# EAGLE board Layout_PCB (EAGLE 9.7.0)
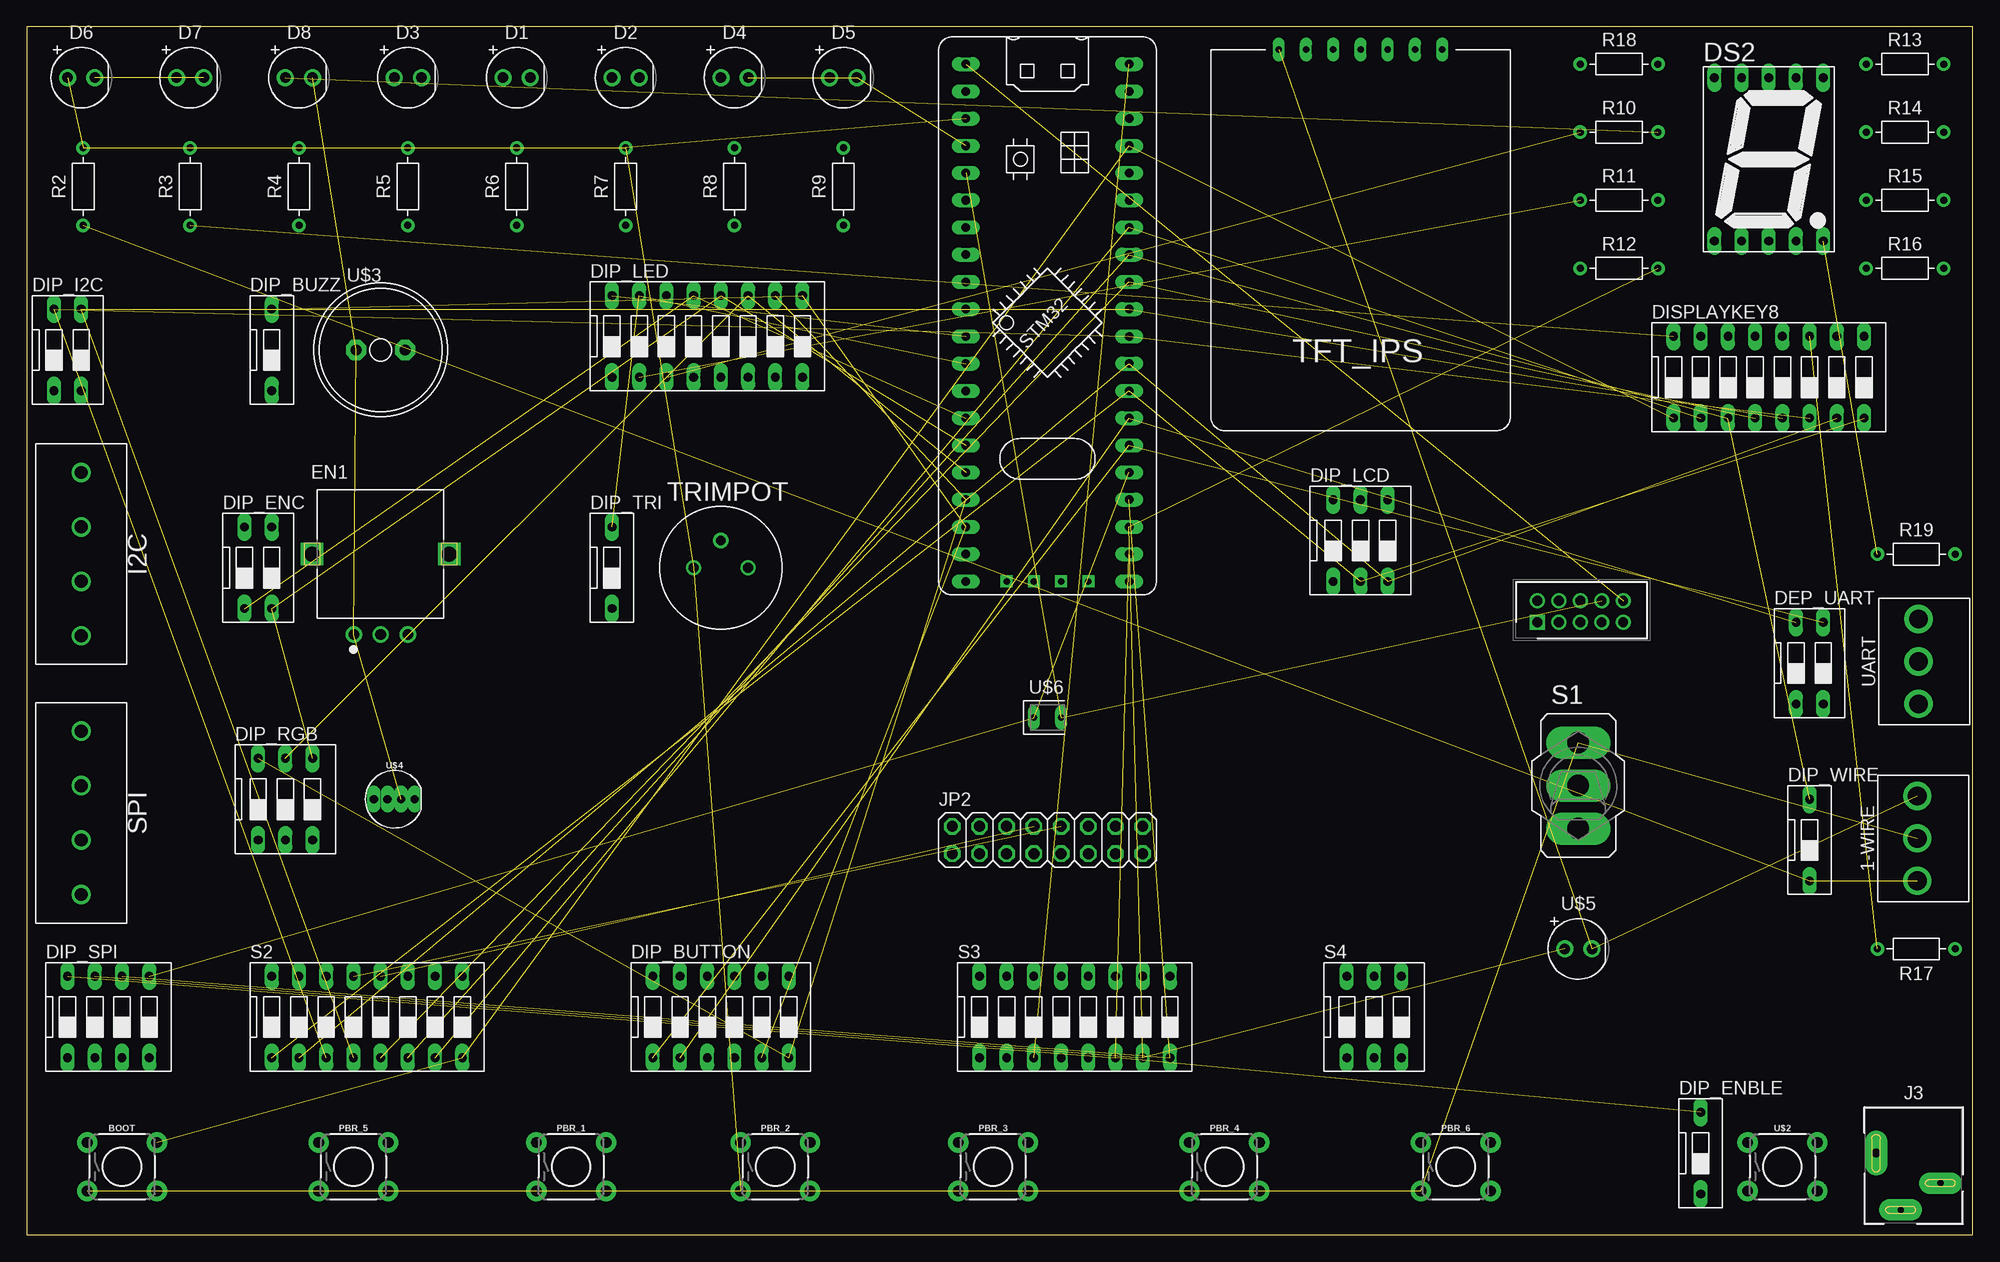
[diagram p0: board, top side]
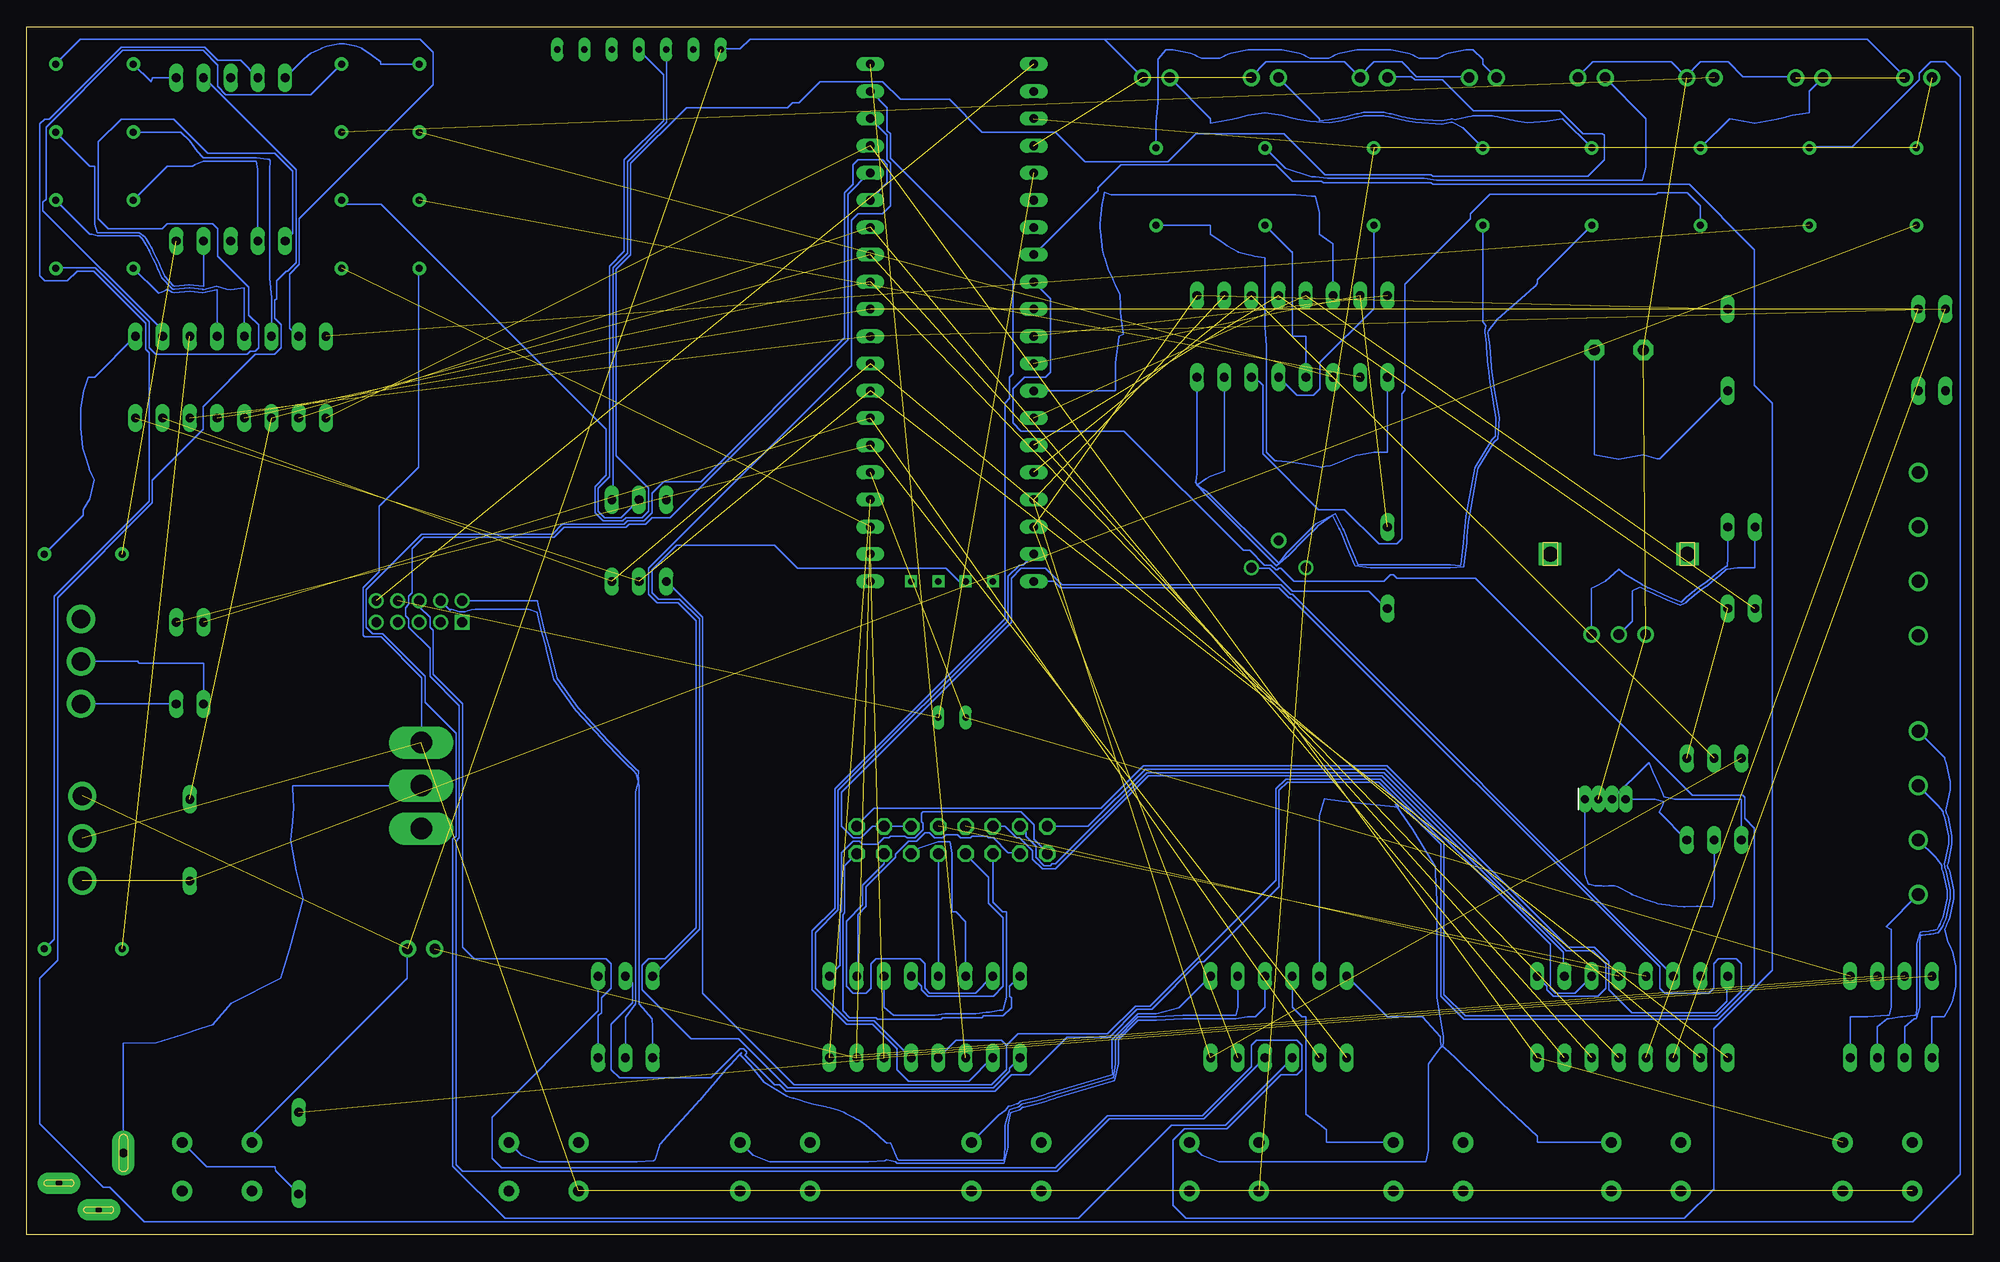
[diagram p1: board, bottom side, seen from below]

Size 181.59 x 112.7 mm. Coordinates in mm from the lower left corner, seen from the top.
Outline: 0,0 181.59,0 181.59,112.7 0,112.7 0,0
Copper layers (1*16): Top / Bottom
Stack-up Default Layer Stack: Top User Defined 0.035mm / Dielectric-1 User Defined 1.5mm / Bottom User Defined 0.035mm
Design rules "default": minimum track width 6mil, minimum drill 0.35mm, track to track 6mil, track to pad 6mil, pad to pad 6mil, via to via 6mil, smd to smd 6mil, copper to edge 40mil, drill to drill 6mil, minimum pad ring 10mil, minimum via ring 8mil, stop-mask expansion 4mil, vias tented up to drill 0mil, thermal gap 10mil

## Footprints (pad centres in the part's own frame; a part is rotated, then mirrored left to right if it is on the bottom)
B3P-VH_396_3N = drill 1.75: 1 0,0; 2 3.96,0; 3 7.92,0
TACTILE_SWITCH_PTH_6.0MM = drill 1.016 pad 1.88: 1 -3.251,2.261; 2 3.251,2.261; 3 -3.251,-2.261; 4 3.251,-2.261
LEDRD254W60D565H860B = drill 0.981 pad 1.581: 1 -1.27,0; 2 1.27,0
DS-02 = drill 0.813 long: 1 -1.27,-3.81; 2 1.27,-3.81; 3 1.27,3.81; 4 -1.27,3.81
DS-06 = drill 0.813 long: 1 -6.35,-3.81; 2 -3.81,-3.81; 3 -1.27,-3.81; 4 1.27,-3.81; 5 3.81,-3.81; 6 6.35,-3.81; 7 6.35,3.81; 8 3.81,3.81; 9 1.27,3.81; 10 -1.27,3.81; 11 -3.81,3.81; 12 -6.35,3.81
DS-01 = drill 0.813 long: 1 0,-3.81; 2 0,3.81
DS-03 = drill 0.813 long: 1 -2.54,-3.81; 2 0,-3.81; 3 2.54,-3.81; 4 2.54,3.81; 5 0,3.81; 6 -2.54,3.81
DS-08 = drill 0.813 long: 1 -8.89,-3.81; 2 -6.35,-3.81; 3 -3.81,-3.81; 4 -1.27,-3.81; 5 1.27,-3.81; 6 3.81,-3.81; 7 6.35,-3.81; 8 8.89,-3.81; 9 8.89,3.81; 10 6.35,3.81; 11 3.81,3.81; 12 1.27,3.81; 13 -1.27,3.81; 14 -3.81,3.81; 15 -6.35,3.81; 16 -8.89,3.81
DS-04 = drill 0.813 long: 1 -3.81,-3.81; 2 -1.27,-3.81; 3 1.27,-3.81; 4 3.81,-3.81; 5 3.81,3.81; 6 1.27,3.81; 7 -1.27,3.81; 8 -3.81,3.81
7SEG-13 = drill 0.813 long: 1 -5.08,-7.62; 2 -2.54,-7.62; 3 0,-7.62; 4 2.54,-7.62; 5 5.08,-7.62; 6 5.08,7.62; 7 2.54,7.62; 8 0,7.62; 9 -2.54,7.62; 10 -5.08,7.62
TFT8 = drill 0.6 long: BLK 7.62,20.32; DC 5.08,20.32; GND -7.62,20.32; RES 2.54,20.32; SCL -2.54,20.32; SDA 0,20.32; VCC -5.08,20.32
PEC11L-4125K-N0020 = drill 1: A -2.5,-7.5; B 2.55,-7.5; C 0,-7.5 | drill 1.4 square: M1 -6.4,0; M2 6.4,0
TERMBLK_508-4N = drill 1.2: 1 0,0; 2 5.08,0; 3 10.16,0; 4 15.24,0
694106402002 = drill 0.8 pad 2.1 long: 1 -3.5,0 | drill 0.6 pad 2 long: 2 -1.2,-5.3; 3 2.5,-2.8
2X08 = drill 1.016 octagon: 1 -8.89,-1.27; 2 -8.89,1.27; 3 -6.35,-1.27; 4 -6.35,1.27; 5 -3.81,-1.27; 6 -3.81,1.27; 7 -1.27,-1.27; 8 -1.27,1.27; 9 1.27,-1.27; 10 1.27,1.27; 11 3.81,-1.27; 12 3.81,1.27; 13 6.35,-1.27; 14 6.35,1.27; 15 8.89,-1.27; 16 8.89,1.27
SHDR10W50P200X200_2X5_1200X500 = drill 0.9 pad 1.35 square: 1 0,0 | drill 0.9 pad 1.35: 2 0,2; 3 2,0; 4 2,2; 5 4,0; 6 4,2; 7 6,0; 8 6,2; 9 8,0; 10 8,2
RESAD724W46L381D178B = drill 0.66 pad 1.26: 1 -3.62,0; 2 3.62,0
320-916 = drill 2.007 long: 1 0,4.013; 2 0,0; 3 0,-4.013
3345P-1-502 = drill 0.91: 1 -2.54,0; 2 0,2.54; 3 2.54,0
EN_BUTTON = drill 1.016 pad 1.88: 1 -3.251,2.261; 2 3.251,2.261; 3 -3.251,-2.261; 4 3.251,-2.261
BUZZER = drill 1.016 pad 1.905 octagon: + 2.286,0; - -2.286,0
LED-RGB-THRU = drill 0.762 pad 0.889 long: 1 1.905,0; 2 0.635,0; 3 -0.635,0; 4 -1.905,0
LDR = drill 0.981 pad 1.581: 1 -1.27,0; 2 1.27,0
LED_POWER_ON = drill 0.6 long: P$1 -1.27,0; P$2 1.27,0
BLUE_PILL_3D = drill 0.8 long: P$1 -7.62,15.24; P$2 -7.62,12.7; P$3 -7.62,10.16; P$4 -7.62,7.62; P$5 -7.62,5.08; P$6 -7.62,2.54; P$7 -7.62,0; P$8 -7.62,-2.54; P$9 -7.62,-5.08; P$10 -7.62,-7.62; P$11 -7.62,-10.16; P$12 -7.62,-12.7; P$13 -7.62,-15.24; P$14 -7.62,-17.78; P$15 -7.62,-20.32; P$16 -7.62,-22.86; P$17 -7.62,-25.4; P$18 -7.62,-27.94; P$19 -7.62,-30.48; P$20 -7.62,-33.02; P$21 7.62,15.24; P$22 7.62,12.7; P$23 7.62,10.16; P$24 7.62,7.62; P$25 7.62,5.08; P$26 7.62,2.54; P$27 7.62,0; P$28 7.62,-2.54; P$29 7.62,-5.08; P$30 7.62,-7.62; P$31 7.62,-10.16; P$32 7.62,-12.7; P$33 7.62,-15.24; P$34 7.62,-17.78; P$35 7.62,-20.32; P$36 7.62,-22.86; P$37 7.62,-25.4; P$38 7.62,-27.94; P$39 7.62,-30.48; P$40 7.62,-33.02 | drill 0.6 square: P$41 3.81,-33.02; P$42 1.27,-33.02; P$43 -1.27,-33.02; P$44 -3.81,-33.02

## Placement (x,y rotation side)
1-WIRE  B3P-VH  [B3P-VH_396_3N]  176.42,33.02 90 top
BOOT  PUSHBUTTON_RED  [TACTILE_SWITCH_PTH_6.0MM]  8.89,6.35 0 top
D1  LED_RED  [LEDRD254W60D565H860B]  45.72,107.95 0 top
D2  LED_RED  [LEDRD254W60D565H860B]  55.88,107.95 0 top
D3  LED_RED  [LEDRD254W60D565H860B]  35.56,107.95 0 top
D4  LED_RED  [LEDRD254W60D565H860B]  66.04,107.95 0 top
D5  LED_RED  [LEDRD254W60D565H860B]  76.2,107.95 0 top
D6  LED_RED  [LEDRD254W60D565H860B]  5.08,107.95 0 top
D7  LED_RED  [LEDRD254W60D565H860B]  15.24,107.95 0 top
D8  LED_RED  [LEDRD254W60D565H860B]  25.4,107.95 0 top
DEP_UART  DS02  [DS-02]  166.37,53.34 0 top
DIP_BUTTON  DS06  [DS-06]  64.77,20.32 0 top
DIP_BUZZ  DS01  [DS-01]  22.86,82.55 0 top
DIP_ENBLE  DS01  [DS-01]  156.21,7.62 0 top
DIP_ENC  DS02  [DS-02]  21.59,62.23 0 top
DIP_I2C  DS02  [DS-02]  3.81,82.55 0 top
DIP_LCD  DS03  [DS-03]  124.46,64.77 0 top
DIP_LED  DS08  [DS-08]  63.5,83.82 0 top
DIP_RGB  DS03  [DS-03]  24.13,40.64 0 top
DIP_SPI  DS04  [DS-04]  7.62,20.32 0 top
DIP_TRI  DS01  [DS-01]  54.61,62.23 0 top
DIP_WIRE  DS01  [DS-01]  166.37,36.83 0 top
DISPLAYKEY8  DS08  [DS-08]  162.56,80.01 0 top
DS2  7SEG-CA  [7SEG-13]  162.56,100.33 0 top
DSPLY1  TFT_IPS_1.3  [TFT8]  124.46,90.26 0 top
EN1  PEC11L-4125K-N0020  [PEC11L-4125K-N0020]  33.02,63.5 0 top
I2C  2828XX-4282837-4  [TERMBLK_508-4N]  5.08,55.88 90 top
J3  [694106402002]  176.07,7.62 0 top
JP2  PINHD-2X8  [2X08]  95.25,36.83 0 top
JTAG  A2004WV-2X05P  [SHDR10W50P200X200_2X5_1200X500]  140.97,57.15 0 top
PBR_1  PUSHBUTTON_RED  [TACTILE_SWITCH_PTH_6.0MM]  50.8,6.35 0 top
PBR_2  PUSHBUTTON_RED  [TACTILE_SWITCH_PTH_6.0MM]  69.85,6.35 0 top
PBR_3  PUSHBUTTON_RED  [TACTILE_SWITCH_PTH_6.0MM]  90.17,6.35 0 top
PBR_4  PUSHBUTTON_RED  [TACTILE_SWITCH_PTH_6.0MM]  111.76,6.35 0 top
PBR_5  PUSHBUTTON_RED  [TACTILE_SWITCH_PTH_6.0MM]  30.48,6.35 0 top
PBR_6  PUSHBUTTON_RED  [TACTILE_SWITCH_PTH_6.0MM]  133.35,6.35 0 top
R2  [RESAD724W46L381D178B]  5.27,97.79 90 top
R3  [RESAD724W46L381D178B]  15.24,97.79 90 top
R4  [RESAD724W46L381D178B]  25.4,97.79 90 top
R5  [RESAD724W46L381D178B]  35.56,97.79 90 top
R6  [RESAD724W46L381D178B]  45.72,97.79 90 top
R7  [RESAD724W46L381D178B]  55.88,97.79 90 top
R8  [RESAD724W46L381D178B]  66.04,97.79 90 top
R9  [RESAD724W46L381D178B]  76.2,97.79 90 top
R10  [RESAD724W46L381D178B]  148.59,102.87 0 top
R11  [RESAD724W46L381D178B]  148.59,96.52 0 top
R12  [RESAD724W46L381D178B]  148.59,90.17 0 top
R13  [RESAD724W46L381D178B]  175.26,109.22 0 top
R14  [RESAD724W46L381D178B]  175.26,102.87 0 top
R15  [RESAD724W46L381D178B]  175.26,96.52 0 top
R16  [RESAD724W46L381D178B]  175.26,90.17 0 top
R17  [RESAD724W46L381D178B]  176.32,26.67 180 top
R18  [RESAD724W46L381D178B]  148.59,109.22 0 top
R19  [RESAD724W46L381D178B]  176.32,63.5 0 top
S1  [320-916]  144.78,41.91 0 top
S2  DS08  [DS-08]  31.75,20.32 0 top
S3  DS08  [DS-08]  97.79,20.32 0 top
S4  DS03  [DS-03]  125.73,20.32 0 top
SPI  2828XX-4282837-4  [TERMBLK_508-4N]  5.08,31.75 90 top
TRIMPOT  3345P-1-502  [3345P-1-502]  64.77,62.23 0 top
U$2  EN_BUTTON  [EN_BUTTON]  163.83,6.35 0 top
U$3  BUZZER  [BUZZER]  33.02,82.55 0 top
U$4  LED_RGB  [LED-RGB-THRU]  34.29,40.64 0 top
U$5  LDR  [LDR]  144.78,26.67 0 top
U$6  LED_POWER_ON  [LED_POWER_ON]  95.25,48.26 0 top
U$8  BLUE_PILL_3D  [BLUE_PILL_3D]  95.25,93.98 0 top
UART  B3P-VH  [B3P-VH_396_3N]  176.53,49.53 90 top

## Library data of the parts
1-WIRE UART = Connector; CATEGORY: Connector; DESCRIPTION: CONN HEADER VERT 3POS 3.96MM; MANUFACTURER: JST Sales America Inc.; MPN: B3P-VH; OPERATING_TEMPERATURE: -25°C ~ 85°C; PART_STATUS: Active; ROHS_COMPLIANCE: RoHS2 Compliant; SERIES: VH; TYPE: Top Entry
BOOT DSPLY1 PBR_1-PBR_6 U$2-U$6 U$8 = 1.3_TFT_IPS
D1-D8 = Opto-Electronic; CATEGORY: Opto-Electronic; SUB-CATEGORY: LED
DEP_UART DIP_ENC DIP_I2C = Switch; CATEGORY: SWITCH; MPN: MCNDS02; TYPE: SPST
DIP_BUTTON = Switch; CATEGORY: SWITCH; MPN: MCNDS-06-V; TYPE: SPST
DIP_BUZZ DIP_ENBLE DIP_TRI DIP_WIRE = Switch; CATEGORY: SWITCH; TYPE: SPST
DIP_LCD DIP_RGB S4 = Switch; CATEGORY: SWITCH; MPN: MCNDS-03-V; TYPE: SPST
DIP_LED DISPLAYKEY8 S2 S3 = Switch; CATEGORY: SWITCH; MPN: MCNDS-08-V; TYPE: SPST
DIP_SPI = Switch; CATEGORY: SWITCH; MPN: MCNDS-04-V; TYPE: SPST
DS2 = Opto-Electronic; CATEGORY: Opto-Electronic; SUB-CATEGORY: Display; TYPE: 7-Segment
EN1 = Encoders; CREATED_BY: PCBLayout.com; DIGIKEY_PARTNO: PEC11L-4125K-N0020-ND; MANUFACTURER: Bourns Inc.; MPN: PEC11L-4125K-N0020
I2C SPI = Connector; CATEGORY: Connector; DESCRIPTION: TERM BLK 4P SIDE ENT 5.08mm PCB; MANUFACTURER: TE Connectivity; MPN: 282837-4; OPERATING_TEMPERATURE: 40°C to +105°C; PART_STATUS: Active; ROHS_COMPLIANCE: RoHS Compliant; SERIES: 283737; SUBCATEGORY: Terminal Block; TYPE: Side Wire Entry
J3 = Connector; CATEGORY: Connector; DESCRIPTION: DC POWER JACK - VERTICAL - THT - 2.0 & 2.5Ø - WR-DC; MANUFACTURER: Würth Elektronik; MPN: 694106402002; OPERATING_TEMPERATURE: -40°C to +85°C; PART_STATUS: Active; ROHS_COMPLIANCE: RoHS Compliant; SERIES: WR-DC; SUBCATEGORY: Power Connector; TYPE: Vertical
JP2 = Connector; CATEGORY: CONNECTOR; SUB-CATEGORY: PIN-HEADER
JTAG = A2004WV-2X05P; DESCRIPTION: A2004WV-2X05P JOINT TECH Socket; wire-board; male; 2mm; PIN: 10; THT; 250V; 3A; -2585C; HEIGHT: 6.75mm; MANUFACTURER_NAME: Joint Tech Electronic; MANUFACTURER_PART_NUMBER: A2004WV-2X05P
R2-R19 = Resistor; CATEGORY: Resistor; SUB-CATEGORY: Fixed
S1 = switch
TRIMPOT = Potentiometer_Trimmers; CREATED_BY: PCBLayout.com; DIGIKEY_PN: 3345P-502-ND; MANUFACTURER: Bourns Inc.; MPN: 3345P-1-502

## Nets
3.3V: DSPLY1.VCC
3.3V1: U$8.P$2
3V: U$8.P$7
3V3: JTAG.10 U$8.P$1
5V: 1-WIRE.2 BOOT.3 D6.1 PBR_1.3 PBR_2.3 PBR_3.3 PBR_4.3 PBR_5.3 PBR_6.3 R2.2 R7.2 R12.1 S1.1 TRIMPOT.1 U$8.P$3
AGND: J3.3
GND: 1-WIRE.3 D1.2 D2.2 D3.2 D4.2 D5.2 D6.2 D7.2 D8.2 DSPLY1.GND EN1.A U$2.1 U$3.- U$4.2 U$5.2 U$8.P$4
GND1: JTAG.8 U$6.P$2 U$8.P$5
GND3: U$8.P$10
N$1: DS2.7 R3.2
N$2: DS2.6 R13.1
N$3: DS2.4 R14.2
N$4: J3.1 S1.2
N$5: DS2.2 R15.1
N$6: DS2.1 R16.2
N$7: DS2.9 R17.1
N$8: DS2.10 R18.1
N$9: DS2.5 R19.1
N$11: D4.1 R5.2
N$12: D5.1 R6.2
N$13: D7.1 R4.2
N$14: D3.1 R8.2
N$15: D8.1 R10.2
N$16: D2.1 R11.2
N$17: D1.1 R9.2
NRST: S4.6 U$8.P$43
PA0: DIP_LED.16 U$8.P$11
PA1: DIP_LED.15 DIP_TRI.2 U$8.P$12
PA2: DIP_LED.14 U$8.P$13
PA3: DIP_ENC.1 DIP_LED.13 U$8.P$14
PA4: DIP_ENC.2 DIP_LED.12 DIP_RGB.4 U$8.P$15
PA5: DIP_LED.11 DIP_RGB.5 U$8.P$16
PA6: DIP_BUTTON.6 DIP_LED.10 DIP_RGB.6 U$8.P$17
PA7: DIP_BUTTON.5 DIP_BUZZ.2 DIP_LED.9 U$8.P$18
PA8: S3.5 U$8.P$19
PA9: DIP_LCD.1 S3.4 U$8.P$20
PA10: S3.3 U$8.P$21
PA11: S3.2 U$8.P$22
PA12: S3.1 U$8.P$23
PA15: BOOT.2 DISPLAYKEY8.1 S2.8 U$8.P$24
PB0: DIP_BUTTON.4 U$8.P$25
PB1: DIP_BUTTON.3 U$8.P$26
PB3: DISPLAYKEY8.2 S2.7 U$8.P$27
PB4: DIP_WIRE.2 DISPLAYKEY8.3 S2.6 U$8.P$28
PB5: DISPLAYKEY8.4 S2.5 U$8.P$29
PB6: DIP_I2C.3 DISPLAYKEY8.5 S2.4 U$8.P$30
PB7: DIP_I2C.4 DISPLAYKEY8.6 S2.3 U$8.P$31
PB8: DIP_LCD.3 DISPLAYKEY8.7 S2.2 U$8.P$32
PB9: DIP_LCD.2 DISPLAYKEY8.8 S2.1 U$8.P$33
PB10: DEP_UART.4 DIP_BUTTON.2 U$8.P$34
PB11: DEP_UART.3 DIP_BUTTON.1 U$8.P$35
PB12: DIP_SPI.5 U$6.P$1 U$8.P$36
PB13: DIP_SPI.6 S3.8 U$8.P$37
PB14: DIP_SPI.7 R12.2 S3.7 U$5.1 U$8.P$38
PB15: DIP_ENBLE.2 DIP_SPI.8 S3.6 U$8.P$39
PD1: DISPLAYKEY8.16 R3.1
PD2: DISPLAYKEY8.15 R13.2
PD3: DISPLAYKEY8.14 R14.1
PD4: DISPLAYKEY8.13 R15.2
PD5: DISPLAYKEY8.12 R16.1
PD6: DISPLAYKEY8.11 R17.2
PD7: DISPLAYKEY8.10 R18.2
PD8: DISPLAYKEY8.9 R19.2
PE1: DIP_ENC.3 EN1.B
PE2: DIP_ENC.4 EN1.C
PEN1: DIP_ENBLE.1 U$2.2
PF1: DIP_LCD.4 DSPLY1.SCL
PF2: DIP_LCD.5 DSPLY1.SDA
PF3: DIP_LCD.6
PH1: JP2.1 S3.9
PH2: JP2.3 S3.10
PH3: JP2.5 S3.11
PH4: JP2.7 S3.12
PH5: JP2.9 S3.13
PH6: JP2.11 S3.14
PH7: JP2.13 S3.15
PH8: JP2.15 S3.16
PH9: JP2.2 S2.9
PH10: JP2.4 S2.10
PH11: JP2.6 S2.11
PH12: JP2.8 S2.12
PH13: JP2.10 S2.13
PH14: JP2.12 JP2.14 S2.14
PH15: S2.15
PH16: JP2.16 S2.16
PI1: DIP_I2C.2
PI2: DIP_I2C.1
PJ1: JTAG.2 S4.1
PJ2: JTAG.4 S4.2
PJ3: JTAG.6 S4.3
PL1: DIP_LED.8 R5.1
PL2: DIP_LED.7 R6.1
PL3: DIP_LED.6 R4.1
PL4: DIP_LED.5 R7.1
PL5: DIP_LED.4 R8.1
PL6: DIP_LED.3 R10.1
PL7: DIP_LED.2 R11.1
PL8: DIP_LED.1 R9.1
PN1: DIP_BUTTON.12 PBR_2.2
PN2: DIP_BUTTON.11 PBR_5.2
PN3: DIP_BUTTON.10 PBR_1.2
PN4: DIP_BUTTON.9 PBR_4.2
PN5: DIP_BUTTON.8 PBR_6.2
PN6: DIP_BUTTON.7 PBR_3.2
PR1: DIP_RGB.3 U$4.4
PR2: DIP_RGB.2 U$4.1
PR3: DIP_RGB.1 U$4.3
PS1: DIP_SPI.4 SPI.1
PS2: DIP_SPI.3 SPI.2
PS3: DIP_SPI.2 SPI.3
PS4: DIP_SPI.1 SPI.4
PT1: DIP_TRI.1 TRIMPOT.3
PU1: DEP_UART.2 UART.1
PU2: DEP_UART.1 UART.2
PW1: 1-WIRE.1 DIP_WIRE.1 R2.1
PZ1: DIP_BUZZ.1 U$3.+
SWCLK: S4.5 U$8.P$9
SWDIO: S4.4 U$8.P$8

## Tracks (layer width: path | path; a pad name or v marks a point on that pad's centre or on a via)
3V3  (1 unrouted)
5V  (13 unrouted)
  Bottom 0.152: R12.1 145.03,90.07 145.03,71.63 148.69,67.97 148.69,61.87 150.22,60.35 150.22,55.93 150.06,55.78 148.54,55.78 144.73,51.97 144.73,46.02 S1.1
GND  (8 unrouted)
  Bottom 0.152: 81.03,111.56 114.1,111.56 115.01,110.64 116.84,110.64 DSPLY1.GND | 81.03,111.56 77.52,108.05 D5.2 | 81.03,111.56 9.86,111.56 6.35,108.05 D6.2 | 26.77,108.05 25.4,109.42 22.81,109.42 21.44,108.05 16.56,108.05 D7.2 | 26.77,108.05 28.14,109.42 35.46,109.42 36.83,108.05 D3.2 | 26.77,108.05 D8.2 | U$2.1 160.58,9.45 146.1,23.93 146.1,26.67 U$5.2 | 57.25,108.05 55.88,109.42 53.29,109.42 51.92,108.05 47.04,108.05 D1.2 | 57.25,108.05 58.62,109.42 65.94,109.42 67.31,108.05 D4.2 | 57.25,108.05 D2.2
GND1  (2 unrouted)
N$1
  Bottom 0.152: R3.2 15.19,101.5 11.23,101.5 4.98,107.75 4.98,108.36 3.91,109.42 2.54,109.42 1.17,108.05 1.17,5.64 5.59,1.22 170.64,1.22 173.84,4.42 174.45,4.42 180.39,10.36 180.39,23.93 178.71,25.6 178.71,59.44 169.88,68.28 169.88,70.41 165.15,75.13 165.15,77.27 160.27,82.14 158.44,82.14 157.84,82.75 157.84,84.89 158.44,85.5 158.44,87.17 158.29,87.33 158.29,89 157.38,89.92 157.23,89.92 156.46,90.68 156.46,99.36 165,107.9 DS2.7
N$2
  Bottom 0.152: R13.1 170,107.58 169.89,107.84 169.86,107.95 DS2.6
N$3
  Bottom 0.152: DS2.4 165.1,89.41 165.09,88.49 165.12,88.5 166.44,88.64 166.47,88.64 167.77,88.51 167.94,88.53 168.71,89.44 169.06,90.17 169.07,90.2 169.14,90.36 169.19,90.49 169.29,90.71 169.34,90.81 169.56,91.26 169.74,91.62 169.84,91.84 169.85,91.85 169.91,92 169.97,92.14 170.17,92.47 170.47,92.95 170.56,93.11 171.08,93.5 175.04,93.5 175.26,94.26 175.26,99.69 175.7,99.69 R14.2
N$4
  Bottom 0.152: S1.2 156.76,41.91 156.72,40.64 156.7,39.9 156.79,38.52 156.91,37.27 156.97,36.83 156.44,33.95 156,32.09 155.79,31.35 157.06,26.67 157.74,24.39 157.88,23.95 162.5,21.61 164.26,19.61 165.31,19.28 167.08,18.67 169.5,17.93 172.57,17.88 J3.1
N$5
  Bottom 0.152: DS2.2 160.02,99.42 160.2,100.18 165.12,100.18 165.9,99.83 166.1,99.69 168.47,99.69 R15.1
N$6
  Bottom 0.152: DS2.1 156.77,93.42 156.77,99.21 158.44,100.89 164.69,100.89 167.89,104.09 172.77,104.09 174.9,101.96 174.9,94.79 173.99,93.88 168.96,93.88 168.5,94.34 164.24,94.34 163.78,93.88 163.78,91.29 160.88,88.39 160.88,85.8 159.97,84.89 159.97,82.75 160.27,82.45 160.73,82.45 161.04,82.14 169.57,82.14 170.18,82.75 170.18,85.19 175.21,90.22 178.87,90.22 R16.2
N$7
  Bottom 0.152: DS2.9 161.65,109.58 163.78,109.58 165,110.8 172.77,110.8 179.48,104.09 179.93,104.09 180.39,103.63 180.39,89.46 179.93,89 177.8,89 176.89,89.92 175.36,89.92 170.48,85.04 170.48,82.6 170.18,82.3 170.18,68.43 179.02,59.59 179.02,27.58 R17.1
N$8
  Bottom 0.152: R18.1 148.59,109.22 148.59,109.46 149.43,110.08 150.32,110.68 150.44,110.73 150.7,110.84 150.81,110.88 151.97,111.12 152.45,111.12 153.61,110.88 153.72,110.84 153.98,110.73 154.11,110.68 154.13,110.66 155.09,110.23 155.1,110.24 155.7,109.73 DS2.10
N$9  (1 unrouted)
N$11
  Bottom 0.152: D4.1 60.96,104.14 60.96,103.93 60.09,104.03 58.95,104.23 58.8,104.26 58.49,104.32 58.34,104.36 57.51,104.57 57.34,104.61 57.02,104.67 56.85,104.7 56.81,104.71 54.95,104.71 54.91,104.7 54.74,104.67 54.42,104.61 54.25,104.57 53.41,104.36 53.27,104.32 52.96,104.26 52.82,104.23 51.97,104.08 49.6,103.93 48.76,104.08 48.6,104.11 48.27,104.03 48.11,104.06 47.28,104.28 47.12,104.31 46.8,104.37 46.64,104.4 46.6,104.41 44.84,104.41 44.8,104.4 44.64,104.37 44.32,104.31 44.16,104.28 43.33,104.06 43.17,104.03 42.87,103.96 42.71,103.93 41.57,103.72 39.74,103.88 38.6,104.08 38.29,104.14 R5.2
N$12
  Bottom 0.152: D5.1 71.12,104.14 71.12,103.72 69.08,104.08 68.47,104.21 67.64,104.42 66.98,104.55 66.04,104.69 65.1,104.55 64.44,104.42 63.61,104.21 63,104.08 61.86,103.88 60.03,103.72 58.89,103.93 58.73,103.96 58.43,104.03 58.27,104.06 57.44,104.28 57.28,104.31 56.96,104.37 56.8,104.4 56.76,104.41 55,104.41 54.96,104.4 54.8,104.37 54.48,104.31 54.32,104.28 53.49,104.06 53.33,104.03 53.03,103.96 52.87,103.93 52.03,103.78 49.55,103.63 48.7,103.78 48.54,103.81 47.59,103.28 R6.2
N$13
  Bottom 0.152: R4.2 22.67,104.14 22.36,104.08 20.32,103.72 18.28,104.08 17.67,104.21 16.84,104.42 16.18,104.55 15.24,104.69 15.24,106.68 D7.1
N$14
  Bottom 0.152: R8.2 64.14,99.51 61.69,98.7 61.33,98.7 60.23,98.55 51.16,98.55 50.07,98.4 30.84,98.4 30.48,99.62 30.48,104.14 D3.1
N$15  (1 unrouted)
N$16
  Bottom 0.152: D2.1 54.51,108.05 52.38,108.05 52.07,107.75 49.48,107.75 46.58,104.85 38.51,104.85 36.37,102.72 34.54,102.72 34.39,102.56 34.39,100.28 35.92,98.75 50.39,98.75 50.55,98.91 60.45,98.91 64.26,102.72 72.49,102.72 75.08,100.13 82.85,100.13 85.6,102.87 92.46,102.87 95.5,105.92 100.08,105.92 101.75,107.59 107.54,107.59 109.52,105.61 110.13,105.61 110.59,105.16 120.04,105.16 125.22,99.97 125.22,91.44 126.59,90.07 126.59,72.69 123.55,69.65 123.55,67.51 124.16,66.9 125.68,66.9 125.98,66.6 127.81,66.6 128.57,67.36 128.57,69.8 127.51,70.87 127.51,75.13 148.54,96.16 151.89,96.16 152.2,96.47 R11.2
N$17
  Bottom 0.152: R9.2 76.2,103.77 76.05,105.6 76.05,109.69 75.27,110.56 75.25,110.57 74.62,110.57 73.01,110.23 72.86,110.17 72.53,110.04 72.37,109.97 71.99,109.76 70.25,109.76 69.87,109.97 69.71,110.04 69.38,110.17 69.23,110.23 67.62,110.57 66.99,110.57 66.97,110.56 65.11,110.56 65.09,110.57 64.46,110.57 62.85,110.23 62.7,110.17 62.37,110.04 62.21,109.97 61.84,109.76 60.09,109.76 59.71,109.97 59.55,110.04 59.22,110.17 59.07,110.23 57.46,110.57 56.83,110.57 56.81,110.56 54.95,110.56 54.93,110.57 54.3,110.57 52.69,110.23 52.54,110.17 52.21,110.04 52.05,109.97 51.68,109.76 49.93,109.76 49.55,109.97 49.39,110.04 49.06,110.17 48.91,110.23 47.3,110.57 46.67,110.57 46.65,110.56 45.72,109.69 45.72,109.22 D1.1
NRST
  Bottom 0.152: U$8.P$43 94.59,60.96 95.81,62.18 109.68,62.18 111.81,64.31 120.95,64.31 123.24,62.03 123.24,59.89 122.63,59.28 120.65,59.28 118.82,57.45 118.82,28.5 S4.6
PA0  (1 unrouted)
PA1  (2 unrouted)
PA2
  Bottom 0.152: U$8.P$13 80.9,78.74 79.98,78.75 79.99,78.78 79.99,81.24 79.98,81.27 79.98,81.32 79.98,81.34 79.69,83.81 79.68,83.84 79.26,84.04 79.3,84.22 79.51,86.01 79.53,86.63 79.53,86.7 79.53,86.72 79.57,87.67 79.57,87.69 79.98,88.61 80.07,88.79 80.25,89.17 80.34,89.37 80.59,89.89 80.64,90 80.99,91.09 81.05,91.29 81.15,91.67 81.19,91.86 81.41,93.63 81.42,93.9 81.42,94.25 81.43,94.34 81.26,96.12 81.13,96.76 81.01,97.25 80.43,97.03 63.16,97.03 61.69,96.88 61.33,96.88 60.96,95.35 60.96,93.33 59.96,92.63 59.69,92.46 DIP_LED.14
PA3  (2 unrouted)
PA4  (3 unrouted)
PA5  (2 unrouted)
PA6  (3 unrouted)
PA7  (3 unrouted)
PA8
  Bottom 0.152: S3.5 102.51,19.96 104.95,19.96 108,23.01 108,28.19 105.87,30.33 105.87,41.45 90.02,57.3 90.02,61.42 88.95,62.48 88.65,62.48 U$8.P$19
PA9
  Bottom 0.152: S3.4 94.89,18.14 90.63,18.14 90.17,17.68 | 90.17,17.68 90.17,15.39 91.54,14.02 109.98,14.02 118.52,22.55 118.52,57.61 121.87,60.96 DIP_LCD.1 | U$8.P$20 85.75,60.96 85.14,60.35 64.72,60.35 63.8,59.44 63.65,59.44 29.21,24.99 29.21,23.01 28.75,22.55 24.64,22.55 24.18,23.01 24.18,25.3 23.72,25.76 22.05,25.76 21.59,25.3 21.59,22.71 23.88,20.42 47.35,20.42 49.33,22.4 49.33,36.58 55.27,42.52 64.11,42.52 65.02,41.6 65.02,33.07 76.76,21.34 78.13,21.34 80.72,18.75 89.1,18.75 90.17,17.68
PA10  (1 unrouted)
PA11
  Bottom 0.152: U$8.P$22 102.82,106.68 101.29,105.16 101.29,103.02 100.99,102.72 100.99,100.43 89.56,89 89.56,80.31 89.86,80.01 89.86,78.03 90.32,77.57 90.32,57.45 106.17,41.6 106.17,30.48 108.31,28.35 108.31,22.86 105.1,19.66 102.67,19.66 100.38,17.37 100.38,15.39 99.31,14.33 93.67,14.33 91.54,16.46 S3.2
PA12
  Bottom 0.152: U$8.P$23 101.29,102.56 101.29,100.28 100.99,99.97 100.99,96.01 101.75,95.25 104.04,95.25 104.65,94.64 104.65,81.08 123.55,62.18 123.55,59.74 122.78,58.98 120.8,58.98 119.13,57.3 119.13,28.65 122.02,25.76 123.55,25.76 124.16,25.15 124.16,22.86 119.58,18.29 115.16,18.29 110.59,13.72 91.39,13.72 89.86,15.24 89.86,15.54 S3.1
PA15  (3 unrouted)
PB0
  Bottom 0.152: DIP_BUTTON.4 71.73,10.82 80.57,10.82 85.45,5.94 140.92,5.94 141.53,6.55 141.53,36.73 141.22,37.03 141.22,49.38 143.97,52.12 143.97,54.71 145.95,56.69 145.95,57.45 146.25,57.76 146.25,58.52 145.95,58.83 145.95,59.59 145.64,59.89 145.64,64.01 144.58,65.08 132.38,65.08 131.47,65.99 125.68,65.99 125.37,66.29 123.85,66.29 123.24,66.9 121.56,66.9 104.95,83.52 104.95,97.08 102.97,99.06 U$8.P$25
PB1
  Bottom 0.152: DIP_BUTTON.3 63.5,16.46 69.75,10.21 74.78,10.21 83.46,1.52 136.96,1.52 141.83,6.4 141.83,36.88 141.53,37.19 141.53,46.79 144.42,49.68 144.42,52.12 148.39,56.08 149.3,56.08 149.91,56.69 149.91,60.2 144.73,65.38 132.54,65.38 131.62,66.29 125.83,66.29 125.53,66.6 124,66.6 123.24,67.36 123.24,69.19 122.17,70.26 118.67,70.26 105.26,83.67 105.26,97.23 104.5,97.99 104.5,99.82 104.04,100.28 101.75,100.28 101.29,99.82 101.29,98.15 102.82,96.62 U$8.P$26
PB3  (2 unrouted)
PB4  (3 unrouted)
PB5  (2 unrouted)
PB6  (3 unrouted)
PB7  (3 unrouted)
PB8  (3 unrouted)
PB9  (3 unrouted)
PB10  (2 unrouted)
PB11  (2 unrouted)
PB12  (2 unrouted)
PB13  (2 unrouted)
PB14  (4 unrouted)
PB15  (3 unrouted)
PD1  (1 unrouted)
PD2
  Bottom 0.152: R13.2 178.87,109.27 176.58,111.56 144.88,111.56 143.66,110.34 143.66,107.29 156.16,94.79 156.16,90.53 157.07,89.61 157.07,84.58 156.31,83.82 DISPLAYKEY8.15
PD3
  Bottom 0.152: DISPLAYKEY8.14 158.75,87.43 158.9,89.26 158.9,99.38 158.86,100.19 158.87,100.19 158.95,100.33 159.11,100.33 160.2,100.48 165.12,100.48 165.67,101.08 166.37,102.06 167.25,102.87 R14.1
PD4
  Bottom 0.152: DISPLAYKEY8.13 161.29,88.34 162.56,88.19 162.92,88.23 163.88,88.49 163.91,88.49 165.13,88.19 165.16,88.19 166.4,88.34 166.43,88.34 167.81,88.21 167.98,88.23 168.98,89.31 169.34,90.05 169.35,90.08 169.42,90.24 169.47,90.37 169.57,90.58 169.61,90.67 169.84,91.13 170.02,91.49 170.12,91.72 170.13,91.74 170.19,91.89 170.24,92 170.43,92.31 170.73,92.79 170.82,92.95 171.08,93.19 175.04,93.19 175.48,93.34 175.7,93.34 R15.2
PD5
  Bottom 0.152: DISPLAYKEY8.12 163.83,87.43 163.84,88.19 163.87,88.19 165.17,87.89 165.2,87.89 166.36,88.04 166.39,88.03 167.85,87.9 168.02,87.93 168.48,88.19 168.64,88.12 168.91,87.99 169.03,87.93 169.18,87.87 169.29,87.82 R16.1
PD6  (1 unrouted)
PD7
  Bottom 0.152: DISPLAYKEY8.10 168.96,83.82 168.96,84.43 180.09,95.56 180.09,96.32 179.78,96.62 179.78,103.33 172.62,110.49 165.15,110.49 163.78,109.12 163.78,107.14 163.02,106.38 155.09,106.38 152.35,109.12 R18.2
PD8
  Bottom 0.152: DISPLAYKEY8.9 175.26,80.01 175.84,80.01 176.29,78.76 176.54,77.11 176.54,75.28 176.35,73.36 176.17,72.8 175.78,71.53 175.75,71.44 175.53,70.92 175.32,70.45 175.71,68.64 175.89,68.34 176.32,67.65 176.32,67.12 R19.2
PE1
  Bottom 0.152: EN1.B 35.57,60.3 35.26,60.45 34.3,60.98 33.02,62.12 32.45,61.61 30.9,60.69 30.76,60.62 30.61,60.54 30.3,60.38 30.14,60.3 28.31,59.49 27.28,59.04 27.19,59 26.99,59.2 26.72,59.47 25.66,60.35 25.38,60.53 25.03,60.77 24.95,60.82 24.52,61.15 23.87,61.73 22.98,62.38 22.92,62.38 22.86,63.14 DIP_ENC.3
PE2
  Bottom 0.152: EN1.C 31.77,57.25 31.77,60.09 31.05,60.42 30.9,60.34 30.74,60.27 30.43,60.11 30.27,60.03 28.43,59.22 27.4,58.76 27.3,58.72 26.77,58.98 26.51,59.24 25.48,60.1 25.21,60.28 24.86,60.51 24.77,60.57 24.33,60.91 23.67,61.51 22.98,62.08 22.92,62.08 21.95,62.23 20.32,62.23 DIP_ENC.4
PEN1
  Bottom 0.152: U$2.2 164.82,6.35 158.39,6.35 158.39,6.26 158.37,5.97 DIP_ENBLE.1
PF1
  Bottom 0.152: DIP_LCD.4 126.9,68.58 126.9,90.22 125.53,91.59 125.53,100.13 121.87,103.78 121.87,110.49 DSPLY1.SCL
PF2
  Bottom 0.152: DIP_LCD.5 126.14,66.9 127.66,66.9 128.27,67.51 128.27,69.65 127.2,70.71 127.2,90.37 125.83,91.75 125.83,100.28 122.17,103.94 122.17,108.2 124.46,110.49 DSPLY1.SDA
PH1
  Bottom 0.152: S3.9 106.63,24.23 105.71,25.15 105.71,30.02 105.56,30.18 105.56,35.66 104.5,36.73 103.89,36.73 103.58,36.42 102.21,36.42 101.6,37.03 101.14,37.03 100.99,37.19 99.62,37.19 99.47,37.03 98.7,37.03 97.94,37.8 97.94,38.41 98.09,38.56 98.09,39.32 97.94,39.47 88.8,39.47 87.58,38.25 87.58,36.88 86.36,35.66 JP2.1
PH2
  Bottom 0.152: JP2.3 88.95,35.66 90.02,35.66 91.39,37.03 91.85,37.03 92,37.19 93.37,37.19 93.52,37.03 94.44,37.03 94.74,37.34 95.81,37.34 96.11,37.03 96.88,37.03 97.33,37.49 97.79,37.49 98.55,36.73 99.31,36.73 100.53,35.51 100.53,35.2 103.28,32.46 103.28,30.63 104.04,29.87 104.04,24.23 S3.10
PH3
  Bottom 0.152: JP2.5 91.44,31.04 90.53,30.12 90.17,30.12 90.17,22.15 90.49,20.93 90.8,20.93 91.76,20.78 92.07,20.78 93.03,20.62 95.88,20.62 96.84,20.47 100.69,20.47 101.6,21.23 S3.11
PH4
  Bottom 0.152: S3.12 98.09,23.16 98.09,22.86 97.48,22.25 91.39,22.25 90.47,23.16 90.47,29.57 91.85,30.94 91.85,33.38 93.98,35.51 JP2.7
PH5
  Bottom 0.152: S3.13 JP2.9
PH6
  Bottom 0.152: JP2.11 98.65,35.97 96.57,36.68 95.43,36.68 95.25,35.61 95.25,30.12 94.89,30.12 93.98,29.21 S3.14
PH7
  Bottom 0.152: JP2.13 101.6,34.59 103.58,32.61 103.58,30.79 105.1,29.26 105.1,23.16 104.5,22.55 103.28,22.55 102.82,23.01 102.82,25.3 102.36,25.76 98.25,25.76 97.79,25.3 97.79,23.01 97.33,22.55 93.07,22.55 91.54,24.08 S3.15
PH8
  Bottom 0.152: S3.16 89.86,23.16 89.86,22.25 89.71,22.1 89.71,21.18 90.47,20.42 92.3,20.42 92.46,20.27 96.11,20.27 96.27,20.12 102.21,20.12 102.36,20.27 104.8,20.27 105.41,20.88 105.41,29.87 105.26,30.02 105.26,34.44 JP2.15
PH9
  Bottom 0.152: JP2.2 82.55,38.1 77.22,43.43 54.81,43.43 37.9,26.52 35.46,26.52 34.24,25.3 34.24,23.01 35,22.25 39.12,22.25 39.73,22.86 39.73,23.16 40.64,24.08 S2.9
PH10
  Bottom 0.152: S2.10 38.2,24.23 38.2,26.36 54.97,43.13 77.06,43.13 85.6,34.59 85.9,34.59 86.05,34.44 86.66,34.44 87.43,35.2 87.43,36.27 88.34,37.19 88.34,37.64 88.8,38.1 JP2.4
PH11
  Bottom 0.152: S2.11 37.13,22.55 38.96,22.55 39.42,23.01 39.42,27.13 55.12,42.82 76.91,42.82 85.6,34.14 86.82,34.14 87.73,35.05 87.73,35.81 88.95,37.03 89.26,37.03 90.32,38.1 JP2.6
PH12  (1 unrouted)
PH13  (1 unrouted)
PH14
  Bottom 0.152: JP2.12 JP2.14 102.67,38.1 103.73,37.03 104.5,37.03 105.56,38.1 105.56,41.3 89.71,57.15 89.71,61.27 88.8,62.18 86.51,62.18 84.99,60.66 64.57,60.66 63.65,59.74 63.5,59.74 27.99,24.23 S2.14
PH16
  Bottom 0.152: S2.16 22.96,24.08 22.96,21.79 24.03,20.73 31.8,20.73 33.93,22.86 33.93,25.45 35.31,26.82 37.74,26.82 54.66,43.74 77.37,43.74 81.33,39.78 102.51,39.78 104.19,38.1 JP2.16
PJ1
  Bottom 0.152: JTAG.2 133.93,59.15 133.9,58.75 133.67,58.13 133.63,57.88 133.31,56.48 133.13,55.86 132.85,54.87 132.82,54.76 132.11,51.91 130.14,49.16 128.8,47.69 127.32,46.08 127.07,45.81 126.33,45.05 126.11,44.81 125.51,44.21 125.42,44.13 124.77,43.5 124.5,43.23 124.56,42.69 124.51,42.68 124.46,41.31 124.46,21.54 123.24,20.17 123.21,20.17 123.19,19.41 S4.1
PJ2
  Bottom 0.152: JTAG.4 142.07,58.25 141.97,58.34 141.81,58.3 141.67,58.27 141.51,58.2 141.26,58.15 140.68,58.15 140.43,58.2 140.27,58.27 140.12,58.3 139.76,58.36 134.78,58.36 133.97,58.08 133.93,57.82 133.6,56.41 133.42,55.77 133.14,54.79 133.11,54.68 132.41,51.84 130.36,48.95 129.03,47.48 127.54,45.87 127.29,45.6 126.55,44.84 126.33,44.6 125.71,43.98 125.62,43.9 124.98,43.28 124.72,43.02 124.57,42.38 124.52,42.38 124.77,41.31 124.77,21.54 125.68,20.32 125.73,20.32 S4.2
PJ3
  Bottom 0.152: S4.3 128.27,20.42 127.96,20.73 127.96,22.1 127.05,23.01 127.05,25.3 127.51,25.76 139.85,25.76 140.92,26.82 140.92,49.53 143.66,52.27 143.66,56.39 143.97,56.69 143.97,57.61 144.88,58.52 144.88,59.13 JTAG.6
PL1
  Bottom 0.152: DIP_LED.8 72.39,71.04 72.5,70.23 72.55,70.21 71.71,69.17 64.97,62.43 63.8,63.41 62.43,64.78 61.26,65.95 61.09,66.13 59.73,67.12 59.69,67.05 59.45,66.58 59.13,65.94 59.04,65.76 58.97,65.61 58.33,64.06 58.07,63.41 57.7,62.53 57.65,62.41 56.22,62.23 48.73,62.23 47.49,62.34 47.47,62.45 47.22,64.55 47.2,65.11 47.04,66.51 46.99,66.97 46.17,71.53 44.68,73.95 44.33,74.28 44.19,76.25 44.69,79.1 44.74,79.56 44.86,80.5 44.91,80.96 44.92,81.04 45.06,82.88 45.1,83.2 45.24,84.16 45.21,84.33 44.35,85.41 41.73,87.7 40.89,88.44 40.82,88.5 40.64,88.78 40.64,89.09 R5.1
PL2
  Bottom 0.152: DIP_LED.7 69.85,71.21 71.12,70.75 71.57,70.53 72.37,69.96 72.41,69.94 71.49,69.38 64.76,62.65 64.02,63.63 62.65,65 61.48,66.17 61.3,66.34 59.47,67.27 59.43,67.2 59.18,66.72 58.86,66.08 58.76,65.89 58.69,65.73 58.05,64.17 57.78,63.53 57.42,62.65 57.37,62.52 56.22,62.53 48.73,62.53 47.79,62.4 47.77,62.5 47.52,64.57 47.5,65.13 47.45,65.61 47.35,66.54 47.29,67.02 46.47,71.58 44.89,74.17 44.54,74.5 44.49,76.19 44.99,79.05 45.04,79.53 45.16,80.46 45.21,80.93 45.22,81.02 45.37,82.85 45.4,83.17 45.54,84.22 45.51,84.39 45.45,84.83 45.72,85.17 R6.1
PL3
  Bottom 0.152: DIP_LED.6 67,80.01 66.24,79.25 66.24,72.85 61.06,67.67 58.62,67.67 55.42,64.47 53.75,64.47 53.29,64.92 53.29,78.49 52.98,78.79 52.98,88.7 46.89,94.79 46.89,95.25 45.06,97.08 29.52,97.08 29.36,97.23 26.62,97.23 25.4,96.01 R4.1
PL4
  Bottom 0.152: R7.1 55.88,86.41 60.91,81.38 60.91,78.94 61.52,78.33 63.04,78.33 64.72,80.01 DIP_LED.5
PL5
  Bottom 0.152: R8.1 63.55,91.68 63.5,91.69 63.5,83.82 62.23,83.82 DIP_LED.4
PL6  (1 unrouted)
PL7  (1 unrouted)
PL8
  Bottom 0.152: R9.1 71.12,94.17 71.12,93.33 70.12,92.63 69.85,92.46 69.58,92.28 68.58,91.69 68.53,91.68 67.58,91.42 67.31,91.36 67.04,91.3 66.04,91.14 66.04,84.73 65.89,82.91 65.89,73 65.12,72.24 64.95,72.24 63.55,72.09 63.52,72.09 62.3,71.9 62.26,71.89 61.03,71.67 61,71.66 60.85,71.62 60.8,71.6 60.53,71.66 60.43,71.71 59.95,71.74 59.79,71.8 58.79,72.21 58.57,72.29 57.53,72.71 57.15,72.8 55.88,73.03 54.61,73.03 DIP_LED.1
PN1
  Bottom 0.152: DIP_BUTTON.12 54.61,20.32 51.36,20.32 49.68,18.49 49.68,18.06 49.6,17.54 49.68,17.44 50.35,16.51 50.8,15.89 50.8,7.87 51.05,6.81 70.34,6.81 71.92,7.43 PBR_2.2
PN2
  Bottom 0.152: DIP_BUTTON.11 60.96,39.12 60.52,40.69 60.2,40.63 59.18,40.49 58.86,40.45 55.8,40.13 55.26,40.07 53.97,39.93 53.59,39.88 53.87,40.16 53.83,40.09 52.25,37.77 51.95,37.32 50.14,34.33 50.14,33.67 49.99,31.19 49.99,22.15 49.38,18.49 49.38,18.06 49.42,17.54 49.31,17.44 48.29,16.51 47.94,16.19 44.41,12.74 43.88,12.22 40.64,9.22 40.64,8.61 PBR_5.2
PN3
  Bottom 0.152: DIP_BUTTON.10 63.5,21.23 62.59,20.32 62.23,20.32 62.23,11.22 60.96,10.3 60.33,9.81 60.33,8.61 PBR_1.2
PN4
  Bottom 0.152: PBR_4.2 113.83,7.43 112.25,6.81 103.02,6.81 101.51,6.92 101.38,7.02 100.51,6.8 100.38,6.7 98.6,6.66 90.42,6.66 90.02,8.18 90.02,10.23 89.79,11.39 89.52,11.46 89.04,11.62 88.91,11.66 88.68,11.88 88.55,11.92 87.23,12.23 86.43,12.47 86.19,12.56 85.61,12.75 85.51,12.78 84.23,13.15 80.28,14.31 80.09,14.38 79.7,15.95 79.7,18.19 77.88,20.02 76.15,20.02 73.71,20.17 68.76,20.17 67.67,20.32 66.95,20.32 66.04,21.23 DIP_BUTTON.9
PN5
  Bottom 0.152: PBR_6.2 135.42,7.43 133.84,6.81 124.61,6.81 123.1,6.92 122.97,7.02 122.55,8.29 122.55,8.44 122.44,8.5 122.43,8.5 121.82,9.19 119.13,12.18 | DIP_BUTTON.8 68.58,21.23 68.76,20.47 73.71,20.47 76.15,20.32 77.88,20.32 80.01,18.19 80.01,15.95 80.19,14.66 80.38,14.6 84.32,13.44 85.6,13.07 85.7,13.04 86.29,12.85 86.53,12.76 87.31,12.52 88.63,12.22 88.76,12.18 88.99,11.95 89.13,11.91 89.61,11.76 89.87,11.68 90.32,10.23 90.32,8.18 90.42,6.96 98.6,6.96 100.19,6.94 100.32,7.04 100.96,8.59 101.34,8.53 101.49,8.69 102,9.16 102.18,9.34 103.52,10.43 104.02,10.72 104.15,10.8 104.42,10.95 104.56,11.02 105.13,11.31 105.34,11.43 105.99,11.67 106.49,11.82 106.62,11.85 106.89,11.92 107.02,11.95 108.19,12.19 108.99,12.41 109.39,12.55 109.98,12.73 110.08,12.76 110.42,12.84 110.66,12.9 112.77,14.25 113.7,15.38 113.73,15.4 114.7,16.46 114.84,16.62 114.99,16.77 114.86,17 115.29,16.57 115.37,16.49 116.06,15.73 116.3,15.47 118.6,12.76 118.73,12.62 118.9,12.44 118.93,12.4 119.06,12.26 119.13,12.18 | 119.13,12.18
PN6
  Bottom 0.152: PBR_3.2 90.9,11.13 90.28,11.62 90.26,11.62 89.96,11.97 89.7,12.05 89.22,12.21 89.08,12.25 88.85,12.47 88.7,12.51 87.39,12.82 86.63,13.05 86.39,13.14 85.79,13.33 85.68,13.36 84.41,13.74 80.47,14.89 80.29,14.95 80.31,15.95 80.31,18.19 77.88,20.62 76.15,20.62 74.07,21.18 DIP_BUTTON.7
PR1
  Bottom 0.152: U$4.4 29.62,40.64 28.82,40.39 28.93,40.14 29.25,39.41 DIP_RGB.3
PR2
  Bottom 0.152: U$4.1 36.2,33.62 35.88,32.71 35.73,32.72 35.24,32.56 35.08,32.56 34.6,32.54 34.44,32.54 33.98,32.54 33.82,32.55 33.51,32.56 33.43,32.56 33.11,32.45 33.03,32.41 32.14,31.94 31.97,31.85 31.77,31.75 31.74,31.73 30.84,31.4 30.63,31.32 29.56,30.96 29.36,30.9 28.28,30.73 28.1,30.71 27.02,30.61 26.84,30.6 25.77,30.65 25.59,30.67 24.48,30.61 24.3,30.6 24.13,31.34 DIP_RGB.2
PR3
  Bottom 0.152: U$4.3 30.23,44.06 30.14,43.9 29.84,43.19 29.25,41.87 28.93,41.14 28.82,40.89 27.79,40.64 21.59,40.64 DIP_RGB.1
PS1
  Bottom 0.152: SPI.1 8.09,28.74 7.74,28.56 7.62,28.49 7.62,21.23 7.8,20.47 7.98,20.47 9.8,20.32 11.43,20.32 DIP_SPI.4
PS2
  Bottom 0.152: SPI.2 3.46,35.22 2.89,34.45 2.9,34.44 2.9,34.14 2.89,34.13 2.81,33.92 2.74,33.76 2.39,32.09 2.39,31.41 2.74,29.74 2.81,29.58 2.96,29.2 3.04,29.02 3.15,28.78 3.3,28.48 3.56,28.43 3.7,28.41 3.97,28.36 4.1,28.34 4.73,28.27 4.92,28.24 5.23,27.14 5.23,21.23 5.26,20.47 5.44,20.47 6.53,20.32 6.71,20.32 7.8,20.17 7.98,20.17 8.89,19.41 DIP_SPI.3
PS3
  Bottom 0.152: SPI.3 3.25,40.08 2.75,39.48 2.76,39.46 2.76,39.28 2.75,39.26 2.67,39.06 2.59,38.89 2.24,37.19 2.24,36.47 2.59,34.77 2.67,34.6 2.61,34.34 2.62,34.32 2.62,34.26 2.61,34.24 2.53,34.04 2.45,33.85 2.09,32.12 2.09,31.38 2.45,29.65 2.53,29.46 2.68,29.09 2.76,28.9 2.88,28.65 3.23,28.19 3.51,28.13 3.65,28.1 3.92,28.06 4.06,28.04 4.69,27.96 4.87,27.94 4.93,27.14 4.93,21.23 5.26,20.17 5.44,20.17 6.35,19.41 DIP_SPI.2
PS4
  Bottom 0.152: SPI.4 2.6,44.51 2.63,44.45 2.6,44.39 2.45,44.01 2.09,42.28 2.09,41.54 2.45,39.81 2.53,39.62 2.47,39.36 2.47,39.34 2.47,39.4 2.47,39.38 2.38,39.18 2.3,38.98 1.94,37.22 1.94,36.44 2.3,34.68 2.38,34.48 2.33,34.22 2.33,34.2 2.33,34.38 2.33,34.36 2.24,34.16 2.16,33.94 1.78,32.15 1.78,31.35 2.16,29.56 2.24,29.34 2.4,28.97 2.48,28.78 2.6,28.52 2.35,27.36 2.07,26.92 1.84,26.37 1.8,26.14 1.57,25.06 1.57,23.2 1.8,22.12 1.84,21.89 2.07,21.34 2.64,20.32 3.81,20.32 DIP_SPI.1
PT1
  Bottom 0.152: TRIMPOT.3 67.31,62.18 65.63,62.18 63.5,60.05 56.34,60.05 54.66,58.37 DIP_TRI.1
PU1
  Bottom 0.152: UART.1 DEP_UART.2
PU2
  Bottom 0.152: UART.2 171.22,53.49 171.17,53.35 171.16,53.34 165.1,53.34 DEP_UART.1
PW1  (2 unrouted)
PZ1
  Bottom 0.152: U$3.+ 35.31,72.79 33.02,72.34 30.76,72.79 29.47,72.39 29.21,72.39 DIP_BUZZ.1
SWCLK
  Bottom 0.152: U$8.P$9 86.05,87.33 86.05,80.47 86.51,80.01 88.49,80.01 89.56,78.94 89.56,75.74 88.8,74.98 79.2,74.98 68.07,63.86 67.46,63.86 66.09,62.48 65.48,62.48 65.02,62.03 64.87,62.03 64.72,62.18 64.57,62.18 63.35,60.96 54.97,60.96 54.36,61.57 54.05,61.57 53.75,61.27 46.43,61.27 26.16,41 21.44,41 21.29,40.84 21.29,38.86 20.37,37.95 20.37,23.47 23.72,20.12 47.5,20.12 49.63,22.25 49.63,36.42 55.42,42.22 63.96,42.22 64.72,41.45 64.72,32.46 71.73,25.45 72.19,25.45 76.61,21.03 77.98,21.03 80.57,18.44 84.53,18.44 88.04,14.94 89.71,14.94 91.24,13.41 110.74,13.41 111.35,14.02 111.81,14.02 114.55,16.76 114.4,16.92 114.4,17.07 114.71,17.37 115.01,17.37 117.75,14.63 126.29,14.63 127.05,15.39 127.05,19.66 125.07,21.64 125.07,23.47 S4.5
SWDIO
  Bottom 0.152: S4.4 128.27,20.88 138.18,10.97 138.18,7.16 137.26,6.25 85.6,6.25 80.72,11.12 71.88,11.12 67.31,15.7 67.31,17.68 66.85,18.14 63.04,18.14 62.59,17.68 62.59,15.39 63.04,14.94 64.57,14.94 69.6,9.91 73.56,9.91 74.62,8.84 74.62,2.74 73.41,1.52 26.92,1.52 24.18,4.27 24.18,19.2 18.69,24.69 18.69,77.57 20.37,79.25 20.37,91.9 26.47,97.99 50.39,97.99 50.55,98.15 60.6,98.15 60.76,98.3 63.5,98.3 65.02,99.82 79.5,99.82 81.64,97.69 81.64,97.38 87.58,91.44 U$8.P$8